# Altium PCB 把手锁设置板20326.PcbDoc
Units mil, origin at the board's own origin, x right, y up, seen from the top; angles counter-clockwise.
Board outline 1025 x 1075 mil, 2 copper layers (Top Layer, Bottom Layer); 4 components, 3 nets, 17 pads, 32 vias.
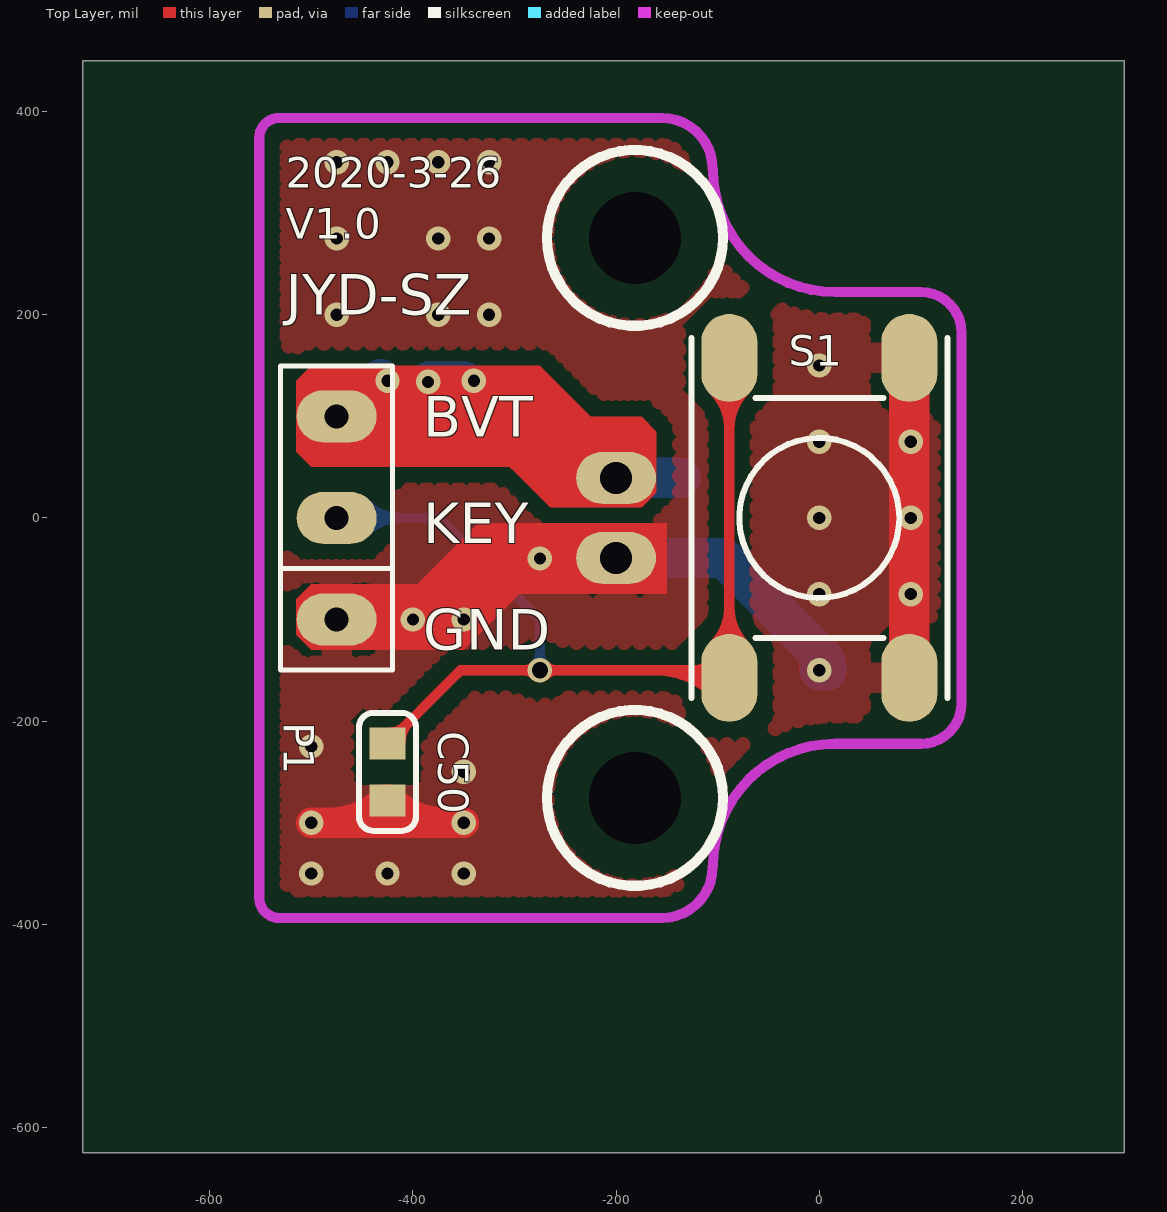
[diagram p0: Top Layer view]
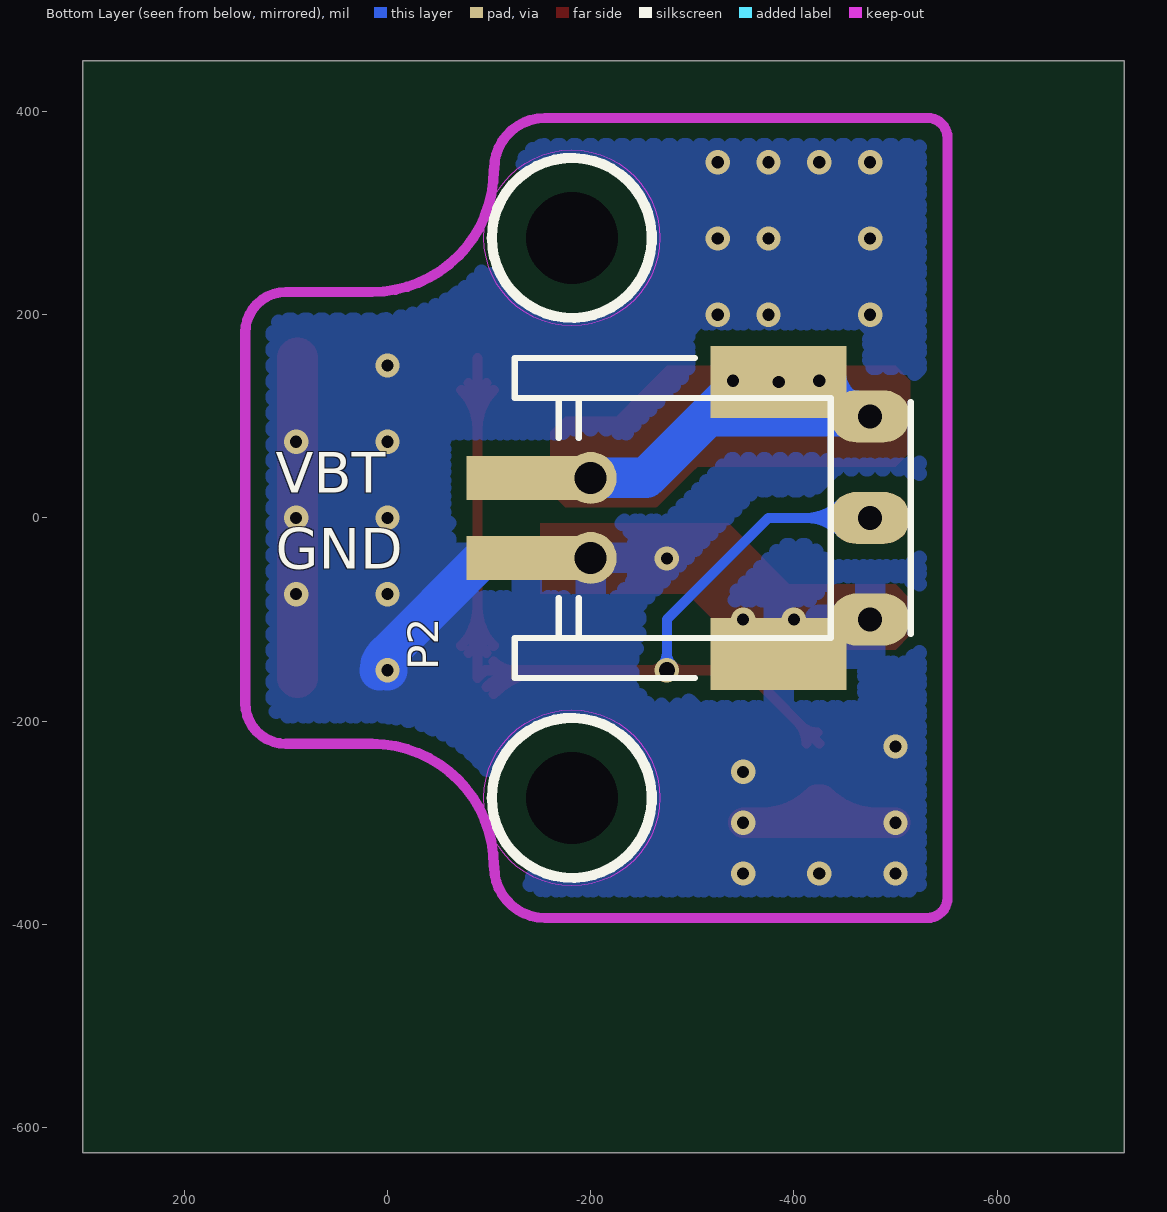
[diagram p1: Bottom Layer view, seen from below]

## Layer stack, top to bottom
Top Layer: signal copper 1.4
Dielectric: dielectric 12.6, FR-4, Dk 4.8
Bottom Layer: signal copper 1.4

## Board outline
-725,450 -725,-625 300,-625 300,450 -725,450

## Design rules (kind name [scope] priority, off if disabled: settings)
Clearance [All] p1: gap=15
PolygonConnect PolygonConnect_1 [IsVia] p1: connectstyle=Direct reliefconductorwidth=10 reliefentries=4 polygonreliefangle="90 Angle" airgapwidth=10
PolygonConnect [All] p2: connectstyle=Relief reliefconductorwidth=30 reliefentries=4 polygonreliefangle="90 Angle" airgapwidth=10
RoutingVias [All] p1: holewidth=28 width=50 viastyle="Through Hole" minholewidth=28 minwidth=50 maxholewidth=28 maxwidth=50
SilkToSilkClearance [All] p1: silktosilkclearance=0
SilkToSolderMaskClearance [IsPad] p1: minsilkscreentomaskgap=0 clearancetoexposedcopper=TRUE
SolderMaskExpansion [All] p1: expansion=4
Width [All] p1: maxlimit=80 minlimit=10 preferedwidth=10
26 further rules are at their usual default settings.

## Components (designator, comment, footprint, x,y, rotation, side; value= is the part's Value field where it differs from the comment)
C50 "1nF" 0603C -425,-250 r270 top
P1 "卧贴3P-1.0MM" 3P-2.54MM -475,-100 r90 top
P2 "2.0弯脚电池插口" S2B-PH -200,0 r90 bottom
S1 "SW-PB" 6*6H9 0,0 r270 top

## Footprints (in the part's own frame and the unit in brackets; to place one, negate y for a bottom-side part, rotate by r counter-clockwise, add the part's x,y. Pads: shape width x height; smd on the part's side, far side on the other; paste and mask are expansions set on the pad)
3P-2.54MM [mm]
  oval 1.3x2 hole 0.6: 1(0,0) 2(2.54,0) 3(5.08,0)
  silkscreen extent -1.26,-1.4 6.34,1.4
6*6H9 [mm]
  oval 2.2x1.4 smd mask+0.05: 1(-4,2.25) 1(4,2.25) 2(-4,-2.25) 2(4,-2.25)
  silkscreen extent -4.5,-3.2 4.5,3.2
0603C [mm]
  rect 0.8x0.9 smd: 1(-0.711,0) 2(0.711,0)
  silkscreen extent -1.47,-0.71 1.47,0.71, body extent -0.8,-0.4 0.8,0.4, height 0.3
S2B-PH [mm]
  round 1.3 / inner round 1.3 / far side oval 1.3x2 hole 0.8 mask+0.05: 1(-1,0) 2(1,0)
  rect 1.1x3 smd mask+0.05: 1(-1,1.6) 2(1,1.6)
  rect 1.8x3.4 smd mask+0.05: A(-3.4,-4.7) B(3.4,-4.7)
  silkscreen extent -4,-8 4,1.9

## Part data
C50: library part CAP-NP, "Capacitor, Ceramic"
P1: library part 3P
P2: library part "Header 2", "Header, 2-Pin"
S1: "Switch"

## Free pads (board coordinates)
  round 39.37 hole 90.55: 1(-181.42,-275.59) 2(-181.42,275.59)

## Via types
v1: diameter 24, hole 12, Top Layer to Bottom Layer, tented both sides, 31 vias
v2: diameter 24, hole 16, Top Layer to Bottom Layer, tented both sides, 1 vias

## Nets (pads, with @x,y where several pads share a name; then routed paths per layer and width w, separated by ;. In a path a pad name is that pad's centre, name@x,y a point inside that pad or via, vN(x,y) a via of type N, cw(c..) or ccw(c..) an arc to the next point about the centre after c; other vN are vias at no path point)
GND: C50.2 P1.1 P2.1 P2.A S1.1 | length 1283.7
  Top Layer w30: v1(-500,-300) -447,-300 ; -481.89,-300 ccw(c-481.89,-223.08) C50.2@-427.5,-277.47 ; C50.2@-422.5,-277.47 ccw(c-368.11,-223.08) -368.11,-300 ; v1(-350,-300) -403,-300 ; -300,-39.37 P2.1@-200,-39.37 ; -447,-300 C50.2 -403,-300 ; -447,-300 -403,-300
  Top Layer w39.37: P1.1 -360.63,-100 -300,-39.37 cw(c-280.82,-58.55) v1@-272.7,-32.67 ; -305.63,-45 cw(c-275,-75.64) v1@-275,-32.32
  Top Layer w40: S1.1@88.58,-157.48 S1.1@88.58,157.48
  Bottom Layer w39.37: P2.1@-200,-39.37 -137.01,-39.37 -94.19,-39.37 0,-133.56 v1(0,-150) ; 1.5,-135.06 cw(c-13.44,-150) v1@7.68,-150
  other v1: -500,-350 -425,-350 -350,-350 -350,-250 -500,-225 -400,-100 -350,-100 0,-75 90,-75 -275,-40 0,0 90,0 0,75 90,75 0,150 -475,200 -375,200 -325,200 -475,275 -375,275 -325,275 -475,350 -425,350 -375,350 -325,350
P04/SET_KEY: C50.1 P1.2 S1.2 | length 1570
  Top Layer w10: C50.1 -360.48,-157.48 -353,-150 -96.06,-150 -88.58,-157.48 S1.2@-88.58,157.48 ; C50.1@-423.03,-211.25 ccw(c-423.03,-190.06) -408.04,-205.04 ; C50.1@-412.28,-222 cw(c-381.58,-222) -403.29,-200.29 ; v2@-279.95,-154.95 ccw(c-291.9,-166.9) -291.9,-150 ccw(c-291.9,-133.1) v2@-279.95,-145.05 ; v2@-270.05,-154.95 cw(c-258.1,-166.9) -258.1,-150 cw(c-258.1,-133.1) v2@-270.05,-145.05 ; -161.1,-150 cw(c-161.1,-230) S1.2@-104.53,-173.43 ; -136.96,-150 cw(c-136.96,-205.86) S1.2@-97.46,-166.36 ; -124.99,-150 ccw(c-124.99,-121.08) S1.2@-104.53,-141.53 ; S1.2@-104.53,-125.78 ccw(c-143.04,-87.27) -88.58,-87.27 ccw(c-34.12,-87.27) S1.2@-72.63,-125.78 ; S1.2@-104.53,125.78 cw(c-143.04,87.27) -88.58,87.27 cw(c-34.12,87.27) S1.2@-72.63,125.78 ; S1.2@-97.46,-132.85 ccw(c-118.9,-111.41) -88.58,-111.41 ccw(c-58.26,-111.41) S1.2@-79.7,-132.85 ; S1.2@-97.46,132.85 cw(c-118.9,111.41) -88.58,111.41 cw(c-58.26,111.41) S1.2@-79.7,132.85
  Bottom Layer w10: P1.2 -375,0 -275,-100 v2(-275,-150) ; P1.2@-446.66,-14.56 cw(c-411.51,-49.71) -411.51,0 cw(c-411.51,49.71) P1.2@-446.66,14.56 ; v2@-279.95,-145.05 ccw(c-291.9,-133.1) -275,-133.1 ccw(c-258.1,-133.1) v2@-270.05,-145.05
VCC: P1.3 P2.2 P2.B | length 972.1
  Top Layer w40: P1.3 -325,100 -264.37,39.37 P2.2@-200,39.37
  Bottom Layer w40: P1.3@-460.82,105.58 ccw(c-453.91,202.72) v1(-385.04,133.86) ; P2.B@-431.75,136.47 cw(c-475,143.88) P1.3 -418.9,100 v1(-385.04,133.86) ; P2.B@-429,128.07 ccw(c-410.79,159.61) v1(-385.04,133.86) ; P2.B@-427.56,100 ccw(c-427.56,135.75) P2.B@-392.32,129.71 ; P2.B@-353.54,118.43 cw(c-353.54,69.86) P2.B@-319.2,104.2 ; P2.2@-137.01,39.37 -200,39.37 -254.37,39.37 -348.86,133.86 v1(-385.04,133.86)
  other v1: -425,135 -340,135

## Polygon pours and split planes (outlines as drawn)
GND on Top Layer "Top Layer-No Net" (hatched 45Degree grid 11 track 15, remove dead copper, pour order 4): -575,425 150,425 150,-400 150,-425 -575,-425 -575,425
GND on Bottom Layer "Top Layer-No Net" (hatched 45Degree grid 11 track 15, remove dead copper, pour order 3): -575,425 150,425 150,-400 150,-425 -575,-425 -575,425

## Keep-outs
Keep-Out Layer:
  pour cut-out: -181.42,-362.2 ccw(c-181.42,-275.59) -94.8,-275.59 ccw(c-181.42,-275.59) -181.42,-188.98 ccw(c-181.42,-275.59) -268.03,-275.59 ccw(c-181.42,-275.59)
  pour cut-out: -181.42,188.98 ccw(c-181.42,275.59) -94.8,275.59 ccw(c-181.42,275.59) -181.42,362.2 ccw(c-181.42,275.59) -268.03,275.59 ccw(c-181.42,275.59)
  lines w10: -105,-343.72 cw(c-155,-343.72) -155,-393.72 -531.49,-393.72 cw(c-531.49,-374.03) -551.18,-374.03 -551.18,374 cw(c-531.49,374) -531.49,393.68 -155,393.68 cw(c-155,343.68) -105,343.68 ; -104.61,-342.36 cw(c15.39,-342.36) 15.39,-222.36 100,-222.36 ccw(c100,-182.36) 140,-182.36 140,182.32 ccw(c100,182.32) 100,222.32 15.39,222.32 cw(c15.39,342.32) -104.61,342.32

## Other copper
Top Layer:
  rectangle net VCC: -500,50 -275,150
  rectangle net VCC: -264.37,10 -175,100
  region net VCC: -174.14,70.86 -160,85 -175,100 -189.14,85.86
  region net VCC: -175,10 -160,25 -184.75,49.75 -199.75,34.75
  rectangle net VCC: -195,25 -160,85
  region net VCC: -265,10 -200,75 -275,150 -340,85
  region net VCC: -500,50 -464.64,85.36 -479.64,100.36 -515,65
  region net VCC: -493.79,113.79 -478.79,128.79 -500,150 -515,135
  rectangle net VCC: -515,65 -455,135
  rectangle net GND: -335.63,-75 -150,-5
  rectangle net GND: -500,-130 -350,-65
  region net GND: -368.92,-116.08 -296.74,-43.89 -335.63,-5 -407.82,-77.18
  region net GND: -486.72,-108.28 -471.72,-93.28 -500,-65 -515,-80
  region net GND: -500,-130 -478.79,-108.79 -493.79,-93.79 -515,-115
  rectangle net GND: -515,-115 -485,-80
  region net GND: -350,-130 -275,-55 -297.5,-32.5 -372.5,-107.5
Bottom Layer:
  rectangle net VCC: -435,80 -315,115

## Silkscreen, mask and mechanical layers (free items; w line width, h text height)
Top Overlay:
  circle w10: c-181.42,275.59 r86.61
  circle w10: c-181.42,-275.59 r86.61
  text "2020-3-26" at -525,325 h30
  text "V1.0" at -525,275 h30
  text "JYD-SZ" at -525,200 h40
  text "BVT" at -390,80 h40
  text "KEY" at -390,-25 h40
  text "GND" at -390,-130 h40
Bottom Overlay:
  circle w10: c-181.42,275.59 r78.74
  circle w10: c-181.42,-275.59 r78.74
  text "VBT" at 110,25 h40
  text "GND" at 110,-50 h40
Mechanical 1:
  text "工艺要求:" at -660,890 h100
  text "1> 板材:FR-4" at -660,690 h50
  text "4> 阻焊:顶层绿油" at -35,690 h50
  text "7> 板框: Keep-out 层" at 640,690 h50
  text "2> 板厚:1.0   mm" at -660,590 h50
  text "5> 阻焊:底面绿油" at -35,590 h50
  text "3> 过孔:盖油" at -660,490 h50
  text "06> 字符:白色双面" at -35,490 h50

## Dimensions
-551.18,-420 to 140,-250 on Mechanical 1
-590.55,-393.7 to -590.55,393.68 on Mechanical 1